# EAGLE board WideField_V2 (EAGLE 7.3.0)
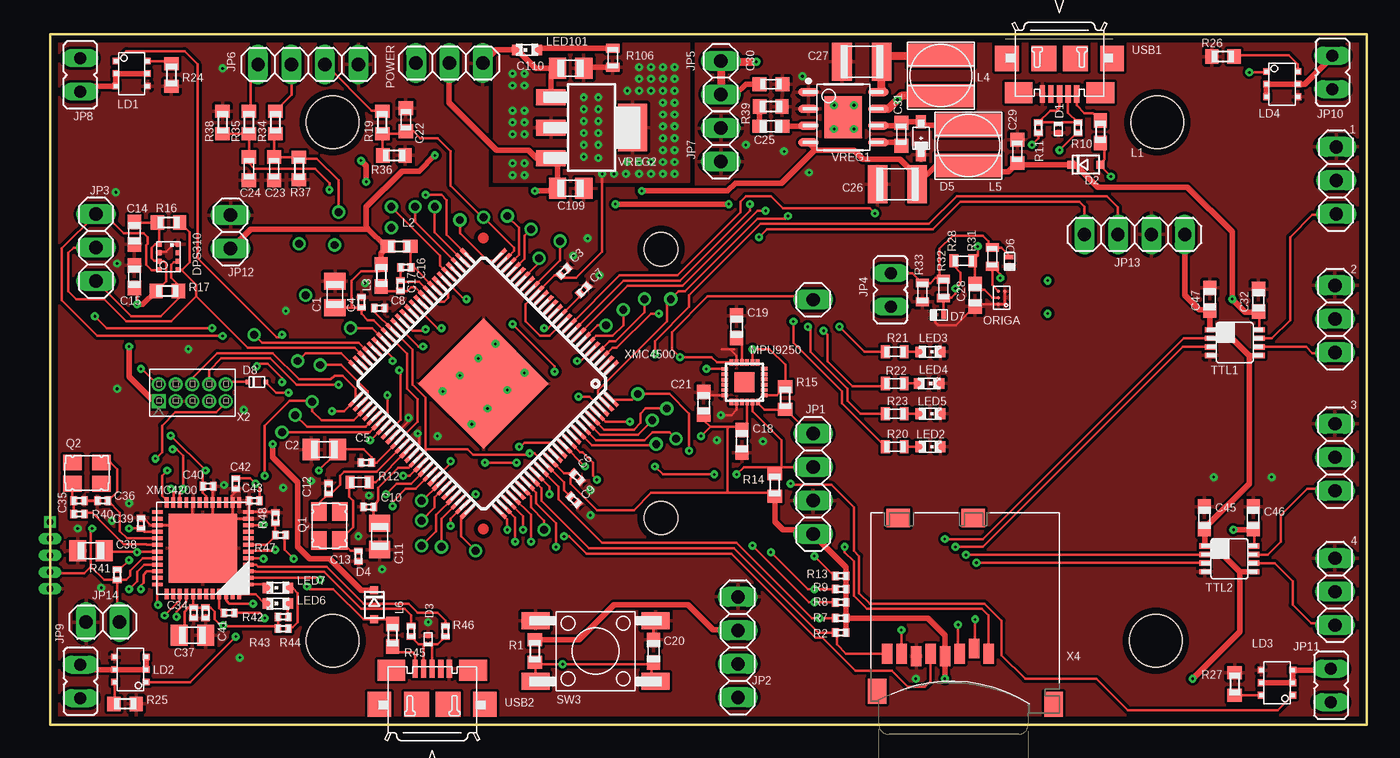
[diagram p0: board, top side]
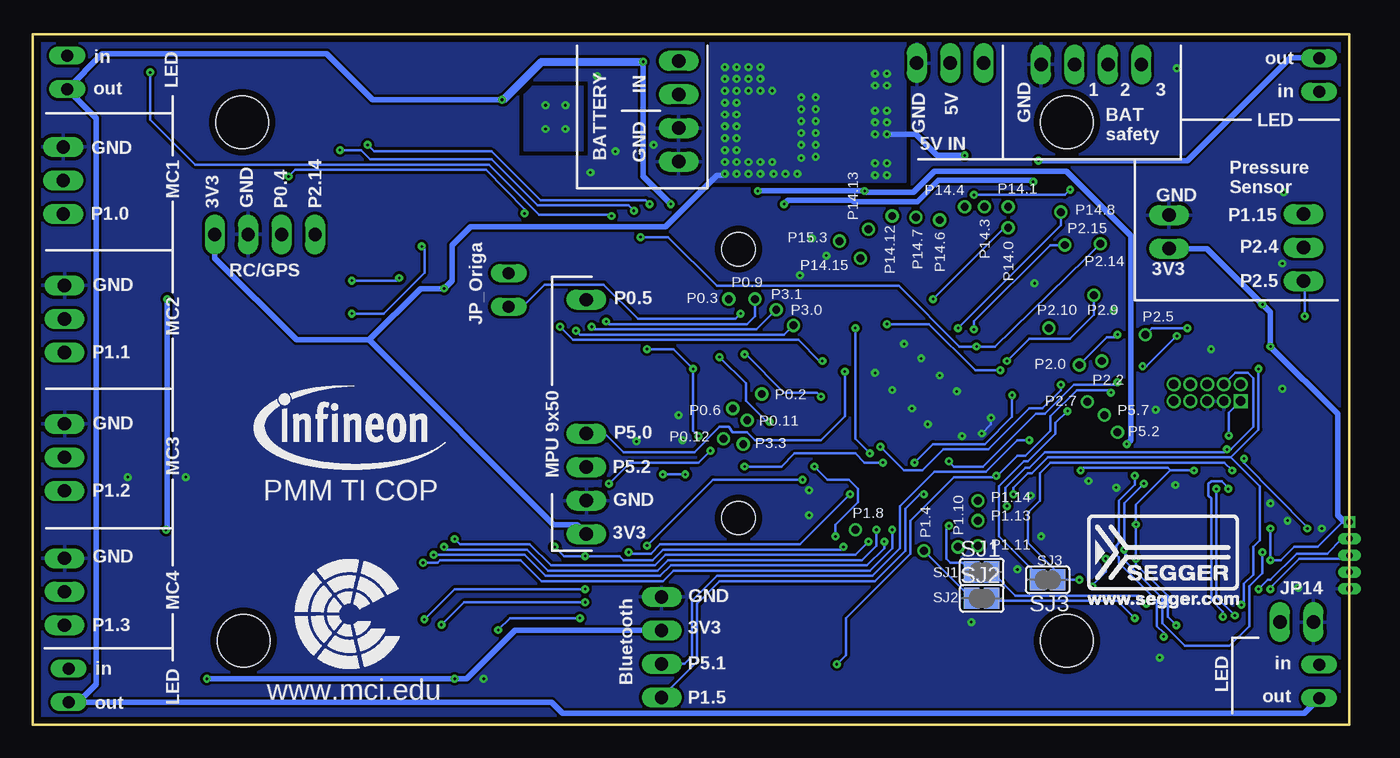
[diagram p1: board, bottom side, seen from below]

Size 99.9 x 52.4 mm. Coordinates in mm from the lower left corner, seen from the top.
Outline: 0,52.4 99.9,52.4 99.9,0 0,0 0,52.4
Copper layers (1*16): Top 0.035mm / dielectric 1.5mm / Bottom 0.035mm
Design rules "Hitzex_CPU_45A *": minimum track width 0.2mm, minimum drill 0.2mm, track to track 0.2mm, track to pad 0.2mm, pad to pad 0.2mm, via to via 0.2mm, smd to smd 0.2mm, copper to edge 0.5mm, drill to drill 0.5mm, minimum pad ring 7mil, minimum via ring 0.2mm, stop-mask expansion 4mil, vias tented up to drill 0.2mm, thermal gap 10mil
Holes 4 mm at 83.92,6.39 21.46,6.39 21.46,45.71 84.02,45.71
Holes 2.54 mm at 46.36,15.69 46.36,36.09

## Footprints (pad centres in the part's own frame; a part is rotated, then mirrored left to right if it is on the bottom)
1X03 = drill 1.016 long: 1 -2.54,0; 2 0,0; 3 2.54,0
C0805K = smd 1.3 x 1.6: 1 -1,0; 2 1,0
C0402 = smd 0.5 x 0.65: 1 -0.4,0; 2 0.4,0
C0603 = smd 1.1 x 1: 1 -0.85,0; 2 0.85,0
C0603K = smd 1.05 x 1.08: 1 -0.875,0; 2 0.875,0
C1210K = smd 1.5 x 2.9: 1 -1.5,0; 2 1.5,0
TSLP-3-1 = smd 0.225 x 0.35: 1 0.113,-0.475; 2 0.487,-0.475 | smd 0.6 x 0.35: 3 0.3,0.175
SOD323-R = smd 0.6 x 0.6: A 1.1,0; C -1.1,0
INF-SOD323_V_1PRIMARY = smd 0.762 x 1.016: 1 0,1.25; 2 0,-1.25
TSLP-2-20 = smd 0.6 x 0.35: P$1 0.1,0.4; P$2 0.1,-0.3
SC79 = smd 0.35 x 0.35: 1 -0.675,0; 2 0.675,0
LGA8R125P0X4_500X300X120 = smd 0.381 x 0.381: P1 0.725,0.975; P2 0.725,0.325; P3 0.725,-0.325; P4 0.725,-0.975; P5 -0.725,-0.975; P6 -0.725,-0.325; P7 -0.725,0.325; P8 -0.725,0.975
1X10 = drill 1.016 long: 1 -11.43,0; 2 -8.89,0; 3 -6.35,0; 4 -3.81,0; 8 6.35,0
1X04 = drill 1.016 long: 1 -3.81,0; 2 -1.27,0; 3 1.27,0; 4 3.81,0
JP1 = drill 0.914 long: 1 0,-1.27; 2 0,1.27
1X02 = drill 1.016 long: 1 -1.27,0; 2 1.27,0
L1608 = smd 1.1 x 1: 1 -0.85,0; 2 0.85,0
WE-TPC = smd 5.08 x 1.778: P$1 0,1.27; P$2 0,-1.778
SC74 = smd 0.5 x 0.5: P_1 -0.05,-2.2; P_2 0.9,-2.2; P_3 1.85,-2.2; P_4 1.85,0.2; P_5 0.9,0.2; P_6 -0.05,0.2
CHIPLED_0603 = smd 0.8 x 0.8: A 0,-0.75; C 0,0.75
QFN3X3-24+ = smd 0.5 x 0.3: 1 -1.5,0.996; 2 -1.5,0.596; 3 -1.5,0.196; 4 -1.5,-0.204; 5 -1.5,-0.604; 6 -1.5,-1.004; 13 1.5,-0.996; 14 1.5,-0.596; 15 1.5,-0.196; 16 1.5,0.204; 17 1.5,0.596; 18 1.5,1.004 | smd 0.3 x 0.5: 7 -0.996,-1.5; 8 -0.596,-1.5; 9 -0.196,-1.5; 10 0.204,-1.5; 11 0.604,-1.5; 12 1.004,-1.5; 19 0.996,1.5; 20 0.596,1.5; 21 0.196,1.5; 22 -0.204,1.5; 23 -0.604,1.5; 24 -1.004,1.5 | smd 1.5 x 1.5: EXP 0,0
WLB-5 = smd 0.25 x 0.25: A1 -0.19,-0.27; A2 -0.19,0.23; B2 0.31,0.23; C1 0.81,-0.27; C2 0.81,0.23
32X25_4PAD = smd 1.4 x 1.2: 1 -1.1,-0.8; 2 1.1,-0.8; 3 1.1,0.8; 4 -1.1,0.8
R0603 = smd 1 x 1.1: 1 -0.85,0; 2 0.85,0
R0402 = smd 0.5 x 0.65: 1 -0.4,0; 2 0.4,0
R0603' = smd 0.67 x 1: 1 -0.715,0; 2 0.715,0
SJ = smd 1.168 x 1.6: 1 -0.762,0; 2 0.762,0
FSM2JSMA = smd 2.1 x 1.3: P -4.55,-2.3; P1 4.55,-2.3; S -4.55,2.3; S1 4.55,2.3
DCT_R-PDSO-G8 = smd 0.4 x 0.8: 1 -0.975,-1.875; 2 -0.325,-1.875; 3 0.325,-1.875; 4 0.975,-1.875; 5 0.975,1.875; 6 0.325,1.875; 7 -0.325,1.875; 8 -0.975,1.875
PINHEADER_SMALL1 = drill 0.6 pad 1: P$1 0,1
PINHEAD_127 = drill 0.508 square: P$1 0,0 | drill 0.508 long: P$2 0,-1.27; P$3 0,-2.54; P$4 0,-3.81; P$5 0,-5.08
ZX62-AB-5PA_MICRO-USB = smd 0.4 x 1.35: 1 -1.3,1.45; 2 -0.65,1.45; 3 0,1.45; 4 0.65,1.45; 5 1.3,1.45 | smd 2.1 x 1.6: S1 -3.1,1.35; S2 3.1,1.35 | smd 1.8 x 1.9: S3 -4,-1.25; S4 4,-1.25 | smd 1.9 x 1.9: S5 -1.2,-1.25; S6 1.2,-1.25
INF-PG-DSO-8-27_N_1PRIMARY = smd 1.55 x 0.6: 1 -2.65,1.905; 2 -2.65,0.635; 3 -2.65,-0.635; 4 -2.65,-1.905; 5 2.65,-1.905; 6 2.65,-0.635; 7 2.65,0.635; 8 2.65,1.905 | smd 2.85 x 3.2: 9 0,0
SOT223 = smd 1.219 x 2.235: 1 -2.311,-3.099; 2 0,-3.099; 3 2.311,-3.099 | smd 3.6 x 2.2: 4 0,3.099
FTSH-105-01-F-D-K = drill 0.7 pad 1.05 square: 1 -2.54,-0.635 | drill 0.7 pad 1.05: 2 -2.54,0.635; 3 -1.27,-0.635; 4 -1.27,0.635; 5 0,-0.635; 6 0,0.635; 7 1.27,-0.635; 8 1.27,0.635; 9 2.54,-0.635; 10 2.54,0.635
3M_MICRO-SD_SLOT = smd 0.8 x 1.5: 1 -1.94,2.7; 2 -0.84,2.3; 3 0.26,2.7; 4 1.36,2.9; 5 2.46,2.7; 6 3.56,2.9; 7 4.66,2.7; 8 5.76,2.7 | smd 1.4 x 1.9: S1 -6.85,6.55; S2 6.55,5.55 | smd 1.8 x 1.4: S3 4.95,-7.6; S4 -0.75,-7.6
QFN-48-7X7 = smd 0.8 x 0.3: 1 -3.45,2.75; 2 -3.45,2.25; 3 -3.45,1.75; 4 -3.45,1.25; 5 -3.45,0.75; 6 -3.45,0.25; 7 -3.45,-0.25; 8 -3.45,-0.75; 9 -3.45,-1.25; 10 -3.45,-1.75; 11 -3.45,-2.25; 12 -3.45,-2.75; 25 3.45,-2.75; 26 3.45,-2.25; 27 3.45,-1.75; 28 3.45,-1.25; 29 3.45,-0.75; 30 3.45,-0.25; 31 3.45,0.25; 32 3.45,0.75; 33 3.45,1.25; 34 3.45,1.75; 35 3.45,2.25; 36 3.45,2.75 | smd 0.3 x 0.8: 13 -2.75,-3.475; 14 -2.25,-3.475; 15 -1.75,-3.475; 16 -1.25,-3.475; 17 -0.75,-3.475; 18 -0.25,-3.475; 19 0.25,-3.475; 20 0.75,-3.475; 21 1.25,-3.475; 22 1.75,-3.475; 23 2.25,-3.475; 24 2.75,-3.475; 37 2.75,3.475; 38 2.25,3.475; 39 1.75,3.475; 40 1.25,3.475; 41 0.75,3.475; 42 0.25,3.475; 43 -0.25,3.475; 44 -0.75,3.475; 45 -1.25,3.475; 46 -1.75,3.475; 47 -2.25,3.475; 48 -2.75,3.475 | smd 5.2 x 5.2: EPAD 0,0
P/PG-LQFP-100-11 = smd 1.35 x 0.29: 1 -7.725,6; 2 -7.725,5.5; 3 -7.725,5; 4 -7.725,4.5; 5 -7.725,4; 6 -7.725,3.5; 7 -7.725,3; 8 -7.725,2.5; 9 -7.725,2; 10 -7.725,1.5; 11 -7.725,1; 12 -7.725,0.5; 13 -7.725,0; 14 -7.725,-0.5; 15 -7.725,-1; 16 -7.725,-1.5; 17 -7.725,-2; 18 -7.725,-2.5; 19 -7.725,-3; 20 -7.725,-3.5; 21 -7.725,-4; 22 -7.725,-4.5; 23 -7.725,-5; 24 -7.725,-5.5; 25 -7.725,-6; 51 7.725,-6; 52 7.725,-5.5; 53 7.725,-5; 54 7.725,-4.5; 55 7.725,-4; 56 7.725,-3.5; 57 7.725,-3; 58 7.725,-2.5; 59 7.725,-2; 60 7.725,-1.5; 61 7.725,-1; 62 7.725,-0.5; 63 7.725,0; 64 7.725,0.5; 65 7.725,1; 66 7.725,1.5; 67 7.725,2; 68 7.725,2.5; 69 7.725,3; 70 7.725,3.5; 71 7.725,4; 72 7.725,4.5; 73 7.725,5; 74 7.725,5.5; 75 7.725,6 | smd 0.29 x 1.35: 26 -6,-7.725; 27 -5.5,-7.725; 28 -5,-7.725; 29 -4.5,-7.725; 30 -4,-7.725; 31 -3.5,-7.725; 32 -3,-7.725; 33 -2.5,-7.725; 34 -2,-7.725; 35 -1.5,-7.725; 36 -1,-7.725; 37 -0.5,-7.725; 38 0,-7.725; 39 0.5,-7.725; 40 1,-7.725; 41 1.5,-7.725; 42 2,-7.725; 43 2.5,-7.725; 44 3,-7.725; 45 3.5,-7.725; 46 4,-7.725; 47 4.5,-7.725; 48 5,-7.725; 49 5.5,-7.725; 50 6,-7.725; 76 6,7.725; 77 5.5,7.725; 78 5,7.725; 79 4.5,7.725; 80 4,7.725; 81 3.5,7.725; 82 3,7.725; 83 2.5,7.725; 84 2,7.725; 85 1.5,7.725; 86 1,7.725; 87 0.5,7.725; 88 0,7.725; 89 -0.5,7.725; 90 -1,7.725; 91 -1.5,7.725; 92 -2,7.725; 93 -2.5,7.725; 94 -3,7.725; 95 -3.5,7.725; 96 -4,7.725; 97 -4.5,7.725; 98 -5,7.725; 99 -5.5,7.725; 100 -6,7.725 | smd 7 x 7: EXP 0,0

## Placement (x,y rotation side)
1  PINHEAD  [1X03]  97.6,41.3 90 top
2  PINHEAD  [1X03]  97.5,30.8 90 top
3  PINHEAD  [1X03]  97.5,20.3 90 top
4  PINHEAD  [1X03]  97.5,10.1 90 top
C1  10uF  [C0805K]  21.62,32.64 90 top
C2  10uF  [C0805K]  20.82,20.89 180 top
C3  100nF  [C0402]  39,34.4 45 top
C4  100nF  [C0402]  23.63,32.05 90 top
C5  100nF  [C0402]  24,19.9 180 top
C6  100nF  [C0402]  40,18.8 315 top
C7  100nF  [C0402]  40.5,33 45 top
C8  100nF  [C0402]  25,31.62 0 top
C9  100nF  [C0402]  39.76,17.06 315 top
C10  100nF  [C0402]  24.17,16.53 180 top
C11  10uF  [C0805K]  25,14.3 270 top
C12  15pF  [C0402]  21.13,17.93 90 top
C13  15pF  [C0402]  23.4,12.8 270 top
C14  100n  [C0603]  6.4,37.3 270 top
C15  100n  [C0603]  6.4,34 270 top
C16  100nF  [C0402]  27,34.7 180 top
C17  100nF  [C0402]  26.6,33.3 90 top
C18  100n  [C0603]  52.5,21.5 270 top
C19  100n  [C0603]  52.1,30.2 270 top
C20  10nF  [C0603]  45.8,5.6 90 top
C21  10n  [C0603]  49.6,24.4 270 top
C22  n.m.  [C0603K]  27,45.9 90 top
C23  n.m.  [C0603K]  17,42.2 270 top
C24  n.m.  [C0603K]  15.1,42.2 270 top
C25  22n  [C0603]  54.7,45.4 0 top
C26  100µ  [C1210K]  64.3,41 180 top
C27  100µ  [C1210K]  61.6,50.3 0 top
C28  100nF  [C0603]  70.2,32.6 90 top
C29  220n  [C0603K]  73.4,43.5 90 top
C30  220n  [C0603K]  54.7,48.6 180 top
C31  220n  [C0603K]  64.6,44.8 270 top
C32  100n  [C0603]  91.7,32.2 90 top
C34  100n  [C0402]  10.9,8.5 270 top
C35  15p  [C0402]  2.2,17 0 top
C36  15p  [C0402]  4,17 180 top
C37  10uF  [C0805K]  10.8,6.8 0 top
C38  4.7µF  [C0805K]  3.1,13.2 180 top
C39  100n  [C0402]  6.9,15.3 90 top
C40  100n  [C0402]  12,18.1 0 top
C41  100n  [C0402]  11.8,8.5 270 top
C42  100n  [C0402]  14.1,18.3 270 top
C43  100n  [C0402]  15.5,17 180 top
C45  100n  [C0603]  87.6,15.7 90 top
C46  100n  [C0603]  91.3,15.7 90 top
C47  100n  [C0603]  88,32.3 90 top
C109  10uF  [C0805K]  39.5,40.7 0 top
C110  10uF  [C0805K]  39.5,49.8 180 top
D1  ESD8V0L2B-03L  [TSLP-3-1]  76.8,45.1 180 top
D2  BAT60A  [SOD323-R]  78.6,42.5 0 top
D3  ESD8V0L2B-03L  [TSLP-3-1]  28.4,6.6 0 top
D4  BAT60A  [SOD323-R]  24.6,9.1 270 top
D5  INF-SOD323_V_1  [INF-SOD323_V_1PRIMARY]  66.1,44.5 180 top
D6  ESD218-B1-02EL  [TSLP-2-20]  72.9,35.2 180 top
D7  ESD218-B1-02EL  [TSLP-2-20]  67.5,31 90 top
D8  BAT54-02V  [SC79]  15.7,26 0 top
DPS310  DPS310  [LGA8R125P0X4_500X300X120]  9,35.5 0 top
JP1  [1X10]  57.9,25.9 90 top
JP2  [1X04]  52.2,5.9 90 top
JP3  [1X03]  3.5,36.2 90 top
JP4  [JP1]  63.8,33 180 top
JP5  [1X02]  50.9,49.1 270 top
JP6  [1X04]  19.6,50.1 0 top
JP7  [1X02]  50.9,44 90 top
JP8  [JP1]  2.3,49.3 180 top
JP9  [JP1]  2.3,3.3 0 top
JP10  [JP1]  97.3,49.5 0 top
JP11  [JP1]  97.2,3 0 top
JP12  [1X02]  13.7,37.4 90 top
JP13  [1X04]  82.3,37.2 180 top
JP14  [1X02]  4,7.8 0 top
L1  BLM18PG600  [L1608]  79.7,45 90 top
L2  BLM18PG600  [L1608]  26.5,36.3 180 top
L3  BLM18PG600  [L1608]  25.13,34.09 90 top
L4  47uH  [WE-TPC]  67.6,49.5 0 top
L5  47uH  [WE-TPC]  69.7,44.2 0 top
L6  BLM18PG600  [L1608]  26,6.8 270 top
LD1  BCU320  [SC74]  7.2,50.3 270 top
LD2  BCU320  [SC74]  5.1,3.3 90 top
LD3  BCU320  [SC74]  92.1,2.3 90 top
LD4  BCU320  [SC74]  94.5,49.5 270 top
LED2  LED-GN/D/0603  [CHIPLED_0603]  66.8,21.1 270 top
LED3  LED-GN/D/0603  [CHIPLED_0603]  66.8,28.3 270 top
LED4  LED-GN/D/0603  [CHIPLED_0603]  66.7,25.9 270 top
LED5  LED-GN/D/0603  [CHIPLED_0603]  66.8,23.6 270 top
LED6  LED-GN/D/0603  [CHIPLED_0603]  17.3,9.2 90 top
LED7  LED-RED/D/0603  [CHIPLED_0603]  17.3,10.4 90 top
LED101  LED-GN/D/0603  [CHIPLED_0603]  36.2,51.2 90 top
MPU9250  9250  [QFN3X3-24+]  52.7,26 180 top
ORIGA  n.m.  [WLB-5]  72.2,32.1 90 top
POWER  [1X03]  30.3,50.2 180 top
Q1  12MHZ/S/3.2X2.5  [32X25_4PAD]  21.2,15.1 270 top
Q2  12MHZ/S/3.2X2.5  [32X25_4PAD]  2.8,19.1 0 top
R1  10k  [R0603]  36.8,5.6 90 top
R2  10k  [R0402]  60,7 0 top
R7  10k  [R0402]  60,8.1 0 top
R8  10k  [R0402]  60,9.3 0 top
R9  10k  [R0402]  60,10.3 0 top
R10  33R  [R0402]  78,45.3 270 top
R11  33R  [R0402]  75,45.3 270 top
R12  510R  [R0603']  23.5,18.4 180 top
R13  10k  [R0402]  60,11.3 0 top
R14  10k  [R0603]  55,18.2 270 top
R15  10k  [R0603]  55.8,24.8 90 top
R16  1k  [R0603]  9,38.1 0 top
R17  1k  [R0603]  8.9,32.9 0 top
R19  30k  [R0603]  25.2,45.7 90 top
R20  680R  [R0603']  64.1,21.1 180 top
R21  680R  [R0603']  64.1,28.3 180 top
R22  680R  [R0603']  64.1,25.9 180 top
R23  680R  [R0603']  64.1,23.6 180 top
R24  n.m.  [R0603]  9.2,49.3 270 top
R25  n.m.  [R0603]  5.7,1.6 0 top
R26  n.m.  [R0603]  89,50.7 180 top
R27  n.m.  [R0603]  89.9,3.1 90 top
R28  20R  [R0603']  69.3,35.2 0 top
R31  25R  [R0603']  71.5,35.5 90 top
R32  1k  [R0603']  67.8,33.1 90 top
R33  330k  [R0603']  66.2,32.8 270 top
R34  30k  [R0603]  17.1,45.7 90 top
R35  30k  [R0603]  15.1,45.7 90 top
R36  10k  [R0603]  26.1,43.2 180 top
R37  10k  [R0603]  18.9,42.2 90 top
R38  10k  [R0603]  13.1,45.7 270 top
R39  22k  [R0603]  54.7,46.9 180 top
R40  510R  [R0402]  2.2,16 0 top
R41  10k  [R0402]  5.1,11.4 90 top
R42  510R  [R0402]  13.6,8.5 0 top
R43  680R  [R0402]  17.7,8.2 180 top
R44  680R  [R0402]  17.7,7.3 180 top
R45  33R  [R0402]  27.4,7.1 90 top
R46  33R  [R0402]  30,7.1 90 top
R47  4.7k  [R0402]  17.5,14.4 180 top
R48  10k  [R0402]  17.1,15.7 90 top
R106  680R  [R0603']  42.7,50.6 270 top
SJ1  [SJ]  27.9,11.6 0 bottom
SJ2  [SJ]  27.9,9.6 0 bottom
SJ3  [SJ]  22.9,11 180 bottom
SW3  TMPS2-SMD  [FSM2JSMA]  41.4,5.6 0 top
TTL1  SN74LVC2T45DCT  [DCT_R-PDSO-G8]  89.9,29 270 top
TTL2  SN74LVC2T45DCT  [DCT_R-PDSO-G8]  89.5,12.6 270 top
U$4  SEGGER.L_100  [LOGO_100]  19.9,9.1 0 top
U$6  PINHEADSMALL1  [PINHEADER_SMALL1]  46,20.3 0 top
U$7  PINHEADSMALL1  [PINHEADER_SMALL1]  47.5,20.7 0 top
U$10  PINHEADSMALL1  [PINHEADER_SMALL1]  43.5,30.5 0 top
U$12  n.m.  [PINHEAD_127]  0,15.4 0 top
U$25  PINHEADSMALL1  [PINHEADER_SMALL1]  42.2,29.3 0 top
U$26  PINHEADSMALL1  [PINHEADER_SMALL1]  21.6,35.4 0 top
U$27  PINHEADSMALL1  [PINHEADER_SMALL1]  18.9,35.5 0 top
U$28  PINHEADSMALL1  [PINHEADER_SMALL1]  22.8,29.1 0 top
U$29  PINHEADSMALL1  [PINHEADER_SMALL1]  19.9,23.5 0 top
U$30  PINHEADSMALL1  [PINHEADER_SMALL1]  19.4,31.6 0 top
U$31  PINHEADSMALL1  [PINHEADER_SMALL1]  15.5,28.6 0 top
U$35  PINHEADSMALL1  [PINHEADER_SMALL1]  20.5,26.3 0 top
U$36  PINHEADSMALL1  [PINHEADER_SMALL1]  18.6,22.5 0 top
U$37  PINHEADSMALL1  [PINHEADER_SMALL1]  17.6,21.2 0 top
U$38  PINHEADSMALL1  [PINHEADER_SMALL1]  38.7,35.7 0 top
U$40  PINHEADSMALL1  [PINHEADER_SMALL1]  32.3,12.2 0 top
U$41  PINHEADSMALL1  [PINHEADER_SMALL1]  25.9,36.7 0 top
U$42  PINHEADSMALL1  [PINHEADER_SMALL1]  25.9,38.3 0 top
U$44  PINHEADSMALL1  [PINHEADER_SMALL1]  27.7,38.3 0 top
U$45  PINHEADSMALL1  [PINHEADER_SMALL1]  29.2,38.3 0 top
U$47  PINHEADSMALL1  [PINHEADER_SMALL1]  31.1,37.3 0 top
U$48  PINHEADSMALL1  [PINHEADER_SMALL1]  32.9,37.5 0 top
U$49  PINHEADSMALL1  [PINHEADER_SMALL1]  21.9,37.9 0 top
U$52  PINHEADSMALL1  [PINHEADER_SMALL1]  34.7,37.6 0 top
U$53  PINHEADSMALL1  [PINHEADER_SMALL1]  36.5,36.6 0 top
U$55  PINHEADSMALL1  [PINHEADER_SMALL1]  37.1,34.4 0 top
U$57  PINHEADSMALL1  [PINHEADER_SMALL1]  37.5,13.8 0 top
U$59  PINHEADSMALL1  [PINHEADER_SMALL1]  29.7,12.5 0 top
U$60  PINHEADSMALL1  [PINHEADER_SMALL1]  28.2,12.6 0 top
U$62  PINHEADSMALL1  [PINHEADER_SMALL1]  28.2,14.5 0 top
U$63  PINHEADSMALL1  [PINHEADER_SMALL1]  28.2,16 0 top
U$65  PINHEADSMALL1  [PINHEADER_SMALL1]  18.8,26.6 0 top
U$67  PINHEADSMALL1  [PINHEADER_SMALL1]  44.6,24.1 0 top
U$68  PINHEADSMALL1  [PINHEADER_SMALL1]  47.1,31.3 0 top
U$71  PINHEADSMALL1  [PINHEADER_SMALL1]  46.8,23 0 top
U$74  PINHEADSMALL1  [PINHEADER_SMALL1]  45.1,31.3 0 top
U$76  PINHEADSMALL1  [PINHEADER_SMALL1]  45.7,22.1 0 top
USB1  ZX62-AB-5PA  [ZX62-AB-5PA_MICRO-USB]  76.6,49.3 180 top
USB2  ZX62-AB-5PA  [ZX62-AB-5PA_MICRO-USB]  29,2.8 0 top
VREG1  IFX-91041-V50  [INF-PG-DSO-8-27_N_1PRIMARY]  60.2,46.1 0 top
VREG2  IFX1117MEV33  [SOT223]  41.1,45.3 270 top
X2  FTSH-105-01-F-D-K  [FTSH-105-01-F-D-K]  10.8,25.2 0 top
X4  3M_2908-05WB  [3M_MICRO-SD_SLOT]  69.3,8.1 180 top
XMC4200  XMC4200_QFN48  [QFN-48-7X7]  11.6,13.4 180 top
XMC4500  XMC4500_LQFP100  [P/PG-LQFP-100-11]  32.89,25.89 225 top

## Library data of the parts
1-4 JP1-JP3 JP5-JP7 JP12-JP14 POWER = pinhead
C1 C2 C11 C38 C109 C110 = libHMI_OLED-V1
C3-C10 C12 C13 C16 C17 C34-C36 C39-C43 = libDsC
C14 C15 C18-C32 C37 C45-C47 R1 R14-R17 R19 R24-R27 R34-R39 = libresistor
D1-D4 = libDsDiod
D5 = libBAS21-03W_INF-SOD323V
D6 D7 = libESD218-B1
D8 = DsDiod
DPS310 = libdrucksensorDPS310
JP4 JP8-JP11 SJ1-SJ3 = jumper
L1-L3 L6 = libPDFerr
L4 L5 = lib47µHWuerthChoke
LD1-LD4 = libLEDtreiber BCR320U
LED2-LED7 LED101 = libled
MPU9250 = libinvensense9250
ORIGA = libORIGA
Q1 Q2 = Quarz
R2 R7-R13 R20-R23 R28 R31-R33 R40-R48 R106 = libDsR
SW3 = MSwitch
TTL1 TTL2 = libLEVELSHIFTER_SN74LVCxT45
U$4 = libBOOTKIT1100SEGGER_logo
U$6 U$7 U$10 U$25-U$31 U$35-U$38 U$40-U$42 U$44 U$45 U$47-U$49 U$52 U$53 U$55 U$57 U$59 U$60 U$62 U$63 U$65 U$67 U$68 U$71 U$74 U$76 = pinhead_small1
U$12 = libpinhead_127_marked
USB1 USB2 = XSRRND
VREG1 = libInfineon-DCDC-91041 - DSO-8
VREG2 XMC4500 = libXMC4500_Relax-V1+USBvertical
X2 = Xtv127
X4 = HMI_OLED-V1
XMC4200 = libXMC4000_v4.16

## Nets
AGND: C16.2 C17.2 XMC4500.32 XMC4500.34
AUX_LED: LED7.C XMC4200.1
COOLING: VREG1.9
CS: XMC4200.23 XMC4200.40
DBGPRES#: JP14.2 R41.1 U$12.P$4 X2.9 XMC4200.32
DEBUG_LED: LED6.C XMC4200.48
DEBUG_RX_XMC42/TX_XMC45: SJ1.2 XMC4200.46
DEBUG_TX_XMC42/RX_XMC45: R42.2 SJ2.2
ETH_CLK: XMC4500.39
ETH_CRS: XMC4500.38
ETH_RXD1: XMC4500.49
ETH_TXD0: XMC4500.46
ETH_TXD1: U$30.P$1 XMC4500.45
GND: 1.3 2.3 3.3 4.3 C1.2 C2.2 C3.2 C4.2 C5.2 C6.2 C7.2 C8.2 C9.2 C10.2 C11.2 C12.2 C13.2 C14.2 C15.1 C18.2 C19.1 C20.2 C21.1 C22.2 C23.2 C24.2 C26.2 C27.1 C28.1 C29.2 C30.1 C32.2 C34.2 C35.2 C36.2 C37.2 C38.2 C39.2 C40.2 C41.2 C42.2 C43.2 C45.2 C46.2 C47.2 C109.2 C110.2 D1.3 D3.3 D5.1 D6.P$1 D7.P$1 DPS310.P1 DPS310.P7 JP1.2 JP2.4 JP6.4 JP7.1 JP7.2 JP12.2 JP13.2 JP14.1 LD1.P_4 LD2.P_4 LD3.P_4 LD4.P_4 LED2.C LED3.C LED4.C LED5.C LED101.C MPU9250.11 MPU9250.18 MPU9250.20 ORIGA.A1 ORIGA.A2 ORIGA.C1 POWER.1 R24.2 R25.2 R26.2 R27.2 R33.2 R36.1 R37.1 R38.1 R39.1 R48.2 SW3.S SW3.S1 TTL1.4 TTL2.4 U$12.P$5 USB1.5 USB2.5 VREG1.1 VREG1.2 VREG2.1 X2.3 X2.5 X4.6 XMC4200.11 XMC4200.12 XMC4200.13 XMC4200.14 XMC4200.17 XMC4200.20 XMC4200.27 XMC4200.EPAD XMC4500.59 XMC4500.63 XMC4500.EXP
HIB_IO_0: XMC4500.14
HIB_IO_1: XMC4500.13
MMC_CLK: X4.5 XMC4500.90
MMC_CMD: R8.1 X4.3 XMC4500.91
MMC_DAT0: R7.1 X4.7 XMC4500.85
MMC_DAT1: R2.1 X4.8 XMC4500.83
MMC_DAT2: R13.1 X4.1 XMC4500.82
MMC_DAT3: R9.1 X4.2 XMC4500.84
N$1: LED2.A R20.1
N$2: C38.1 C42.1 C43.1 XMC4200.6 XMC4200.31
N$3: LED3.A R21.1
N$4: LED6.A R43.1
N$5: LED7.A R44.1
N$6: R12.1 XMC4500.62
N$7: C13.1 Q1.3 R12.2
N$8: C12.1 Q1.1 XMC4500.61
N$9: JP6.1 R35.2
N$10: C35.1 Q2.1 R40.1
N$11: L1.2 USB1.1
N$12: C25.2 VREG1.3
N$13: D1.1 R10.1 USB1.2
N$15: C25.1 R39.2
N$16: LED101.A R106.1
N$17: C27.2 L4.P$1 VREG1.8
N$19: C28.2 ORIGA.B2 R28.2
N$21: JP6.2 R34.2
N$22: LED4.A R22.1
N$23: D2.A L1.1 XMC4500.10
N$24: LED5.A R23.1
N$25: ORIGA.C2 R31.1
N$26: LD1.P_6 R24.1
N$27: D6.P$2 JP4.1 R31.2 R32.2 R33.1
N$28: JP8.2 LD1.P_2 LD1.P_3 LD1.P_5
N$29: LD2.P_6 R25.1
N$30: JP9.2 LD2.P_2 LD2.P_3 LD2.P_5
N$31: LD4.P_6 R26.1
N$32: JP10.2 LD4.P_2 LD4.P_3 LD4.P_5
N$33: LD3.P_6 R27.1
N$34: JP11.2 LD3.P_2 LD3.P_3 LD3.P_5
N$35: JP6.3 R19.2
N$36: D1.2 R11.1 USB1.3
N$37: C31.2 VREG1.5
N$38: L6.2 USB2.1
N$39: C31.1 D5.2 L5.P$1 VREG1.6
N$40: R40.2 XMC4200.30
N$41: C36.1 Q2.3 XMC4200.29
N$42: C19.2 MPU9250.10
N$44: D8.1 X2.10
N$47: D3.1 R45.1 USB2.2
N$48: D3.2 R46.1 USB2.3
N$49: D4.A L6.1 R47.1
N$50: R42.1 XMC4200.45
N$52: R47.2 R48.1 XMC4200.7
P0.0: XMC4500.2
P0.1: XMC4500.1
P0.2: LD3.P_1 U$67.P$1 XMC4500.100
P0.3: LD4.P_1 U$68.P$1 XMC4500.99
P0.4: JP13.3 XMC4500.98
P0.5: JP1.8 MPU9250.12 XMC4500.97
P0.6: U$71.P$1 XMC4500.96
P0.7: X2.8 XMC4500.89
P0.8: XMC4500.88
P0.9: R20.2 U$74.P$1 XMC4500.4
P0.10: JP4.2 XMC4500.3
P0.11: U$76.P$1 XMC4500.95
P0.12: U$7.P$1 XMC4500.94
P1.0: TTL1.2 XMC4500.79
P1.1: TTL1.3 XMC4500.78
P1.2: TTL2.2 XMC4500.77
P1.3: TTL2.3 XMC4500.76
P1.4: SJ2.1 U$40.P$1 XMC4500.75
P1.5: JP2.1 SJ1.1 XMC4500.74
P1.8: U$57.P$1 XMC4500.81
P1.9: XMC4500.80
P1.10: U$59.P$1 XMC4500.73
P1.11: U$60.P$1 XMC4500.72
P1.12: XMC4500.71
P1.13: U$62.P$1 XMC4500.70
P1.14: U$63.P$1 XMC4500.69
P1.15: DPS310.P5 JP3.3 XMC4500.68
P2.0: LD1.P_1 U$35.P$1 XMC4500.52
P2.2: U$65.P$1 XMC4500.50
P2.4: DPS310.P4 JP3.2 R16.2 XMC4500.48
P2.5: DPS310.P3 JP3.1 R17.2 U$31.P$1 XMC4500.47
P2.6: XMC4500.54
P2.7: LD2.P_1 U$29.P$1 XMC4500.53
P2.10: U$28.P$1 XMC4500.44
P2.14: JP13.4 U$27.P$1 XMC4500.41
P2.15: U$26.P$1 XMC4500.40
P3.0: R22.2 U$25.P$1 XMC4500.7
P3.1: R23.2 U$10.P$1 XMC4500.6
P3.2: R21.2 XMC4500.5
P3.3: U$6.P$1 XMC4500.93
P3.4: XMC4500.92
P5.0: JP1.4 MPU9250.24 R15.1 XMC4500.58
P5.1: JP2.2 XMC4500.57
P5.2: JP1.3 MPU9250.23 R14.1 U$37.P$1 XMC4500.56
P5.7: U$36.P$1 XMC4500.55
P14.0: U$41.P$1 XMC4500.31
P14.1: U$42.P$1 XMC4500.30
P14.2: XMC4500.29
P14.3: U$44.P$1 XMC4500.28
P14.4: U$45.P$1 XMC4500.27
P14.5: C24.1 R35.1 R38.2 XMC4500.26
P14.6: U$47.P$1 XMC4500.25
P14.7: C22.1 R19.1 R36.2 U$48.P$1 XMC4500.24
P14.8: C23.1 R34.1 R37.2 U$49.P$1 XMC4500.37
P14.9: XMC4500.36
P14.12: U$52.P$1 XMC4500.23
P14.13: U$53.P$1 XMC4500.22
P14.14: XMC4500.21
P14.15: U$55.P$1 XMC4500.20
P15.2: XMC4500.19
P15.3: U$38.P$1 XMC4500.18
PWM_MC1: 1.1 TTL1.7
PWM_MC2: 2.1 TTL1.6
PWM_MC3: 3.1 TTL2.7
PWM_MC4: 4.1 TTL2.6
RESET#: C20.1 D8.2 R1.1 SW3.P SW3.P1 XMC4500.65
RTC1: XMC4500.15
RTC2: XMC4500.16
SWV: SJ3.2 X2.6 XMC4500.51
SWV_DBG: SJ3.1 XMC4200.2 XMC4200.24
TCK: X2.4 XMC4200.22 XMC4200.39 XMC4500.67
TMS: X2.2 XMC4200.35 XMC4200.36 XMC4500.66
USB_DM: R10.2 XMC4500.8
USB_DM1: R45.2 XMC4200.3
USB_DP: R11.2 XMC4500.9
USB_DP1: R46.2 XMC4200.4
VAREF: C16.1 L2.1 XMC4500.33
VBAT: C30.2 JP5.1 JP5.2 JP8.1 JP9.1 JP10.1 JP11.1 L4.P$2 VREG1.7
VDD3.3: C1.1 C2.1 C3.1 C4.1 C5.1 C6.1 C14.1 C15.2 C18.1 C21.2 C34.1 C37.1 C39.1 C40.1 C41.1 C45.1 C47.1 C110.1 D7.P$2 DPS310.P6 DPS310.P8 JP1.1 JP2.3 JP12.1 JP13.1 L2.2 L3.2 MPU9250.1 MPU9250.8 MPU9250.13 MPU9250.22 R1.2 R2.2 R7.2 R8.2 R9.2 R13.2 R14.2 R15.2 R16.1 R17.1 R28.1 R32.1 R41.2 R43.2 R44.2 R106.2 TTL1.1 TTL1.5 TTL2.1 TTL2.5 U$12.P$1 VREG2.2 VREG2.4 X2.1 X4.4 XMC4200.5 XMC4200.10 XMC4200.18 XMC4200.28 XMC4200.41 XMC4500.11 XMC4500.17 XMC4500.43 XMC4500.60 XMC4500.87
VDD5: C26.1 C29.1 C32.1 C46.1 C109.1 D2.C D4.C L5.P$2 POWER.2 TTL1.8 TTL2.8 VREG1.4 VREG2.3
VDDA: C17.1 L3.1 XMC4500.35
VDDC: C7.1 C8.1 C9.1 C10.1 C11.1 XMC4500.12 XMC4500.42 XMC4500.64 XMC4500.86
WTCK: U$12.P$2 XMC4200.34
WTMS: U$12.P$3 XMC4200.33

## Tracks (layer width: path | path; a pad name or v marks a point on that pad's centre or on a via)
AGND
  Top 0.2: XMC4500.32 29.55,33.45 30.2,32.8 30.2,32.4 29.9,32.1 29.51,32.1 XMC4500.34 28.01,33.6 26.7,33.6 C17.2 C16.2
AUX_LED
  Top 0.2: LED7.C 16.3,10.65 XMC4200.1
COOLING  (via drill 0.2)
  Top 0.61: v59.5,45.2 59.5,45.4 VREG1.9
  other vias: 59.5,47 61,47 61,45.2
  pour Bottom: 58.2,48.4 62,48.4 62.6,47.8 62.6,43.6 58.2,43.6
CS  (via drill 0.2)
  Top 0.2: XMC4200.40 10.35,9.35 9.6,8.6 v9.6,8.2 | XMC4200.23 9.4,16.92 9.4,17.7 v9.2,17.9
  Bottom 0.2: v9.6,8.2 9.6,8.6 10.5,9.5 10.5,17.2 10.7,17.4 10.7,18.3 10.5,18.5 9.7,18.5 9.2,18 v9.2,17.9
DBGPRES#  (via drill 0.2)
  Top 0.2: XMC4200.32 7.05,12.65 6.1,11.7 6.1,11.3 5.8,11 R41.1 | X2.9 13.34,24.44 12.6,23.7 9.5,23.7 8.5,22.7 8.5,20.7 v8,20.2 | v3.2,14.9 3.1,14.8 3.1,12 | 5,11.1 R41.1 | 3.1,12 4.1,11 R41.1 | 3.1,12 2.6,11.5 0.09,11.5 U$12.P$4 | R41.1 5.1,7.97 JP14.2
  Bottom 0.2: v8,20.2 8,19.9 3.2,15 v3.2,14.9
DEBUG_LED
  Top 0.2: XMC4200.48 14.38,9.9 15.6,9.9 16.3,9.2 LED6.C
DEBUG_RX_XMC42/TX_XMC45  (via drill 0.2)
  Top 0.2: v15.4,9.2 13.6,9.2 13.35,9.45 XMC4200.46
  Bottom 0.2: v15.4,9.2 16,9.8 25.34,9.8 SJ1.2
DEBUG_TX_XMC42/RX_XMC45  (via drill 0.2)
  Top 0.2: v16.3,8.1 15.9,8.5 R42.2
  Bottom 0.2: SJ2.2 26.94,9.4 17.6,9.4 v16.3,8.1
ETH_TXD1  (via drill 0.2)
  Top 0.2: XMC4500.45 26,27.84 v26,27.6
  Bottom 0.2: v26,27.6 24.3,29.3 21.2,29.3 19.4,31.1 U$30.P$1
GND  (via drill 0.2, 0.2 pad 0.2)
  Top 0.2: ORIGA.C1 ORIGA.A1 ORIGA.A2 70.36,31.91 C28.1 68.75,30.3 67.4,30.3 67.2,30.5 67.2,31 D7.P$1 | DPS310.P7 8.35,35.9 8.8,35.9 9.38,36.48 DPS310.P1 | R33.2 66.2,32 | XMC4500.63 28,21 28,22 v27.9,22.1 | XMC4500.59 27.2,23.03 v27.2,23.3 | C21.1 49.85,25 MPU9250.18 | MPU9250.20 52.1,23.9 51.7,23.5 v50.9,23.5 | 51.9,28.5 51.6,28.5 | 51.6,28.5 51,28.5 | C20.2 45.8,7.75 SW3.S1 | C39.2 7.1,15.7 7.65,15.15 XMC4200.27 10.75,15.15 10.8,15.2 | C35.2 C36.2 | R48.2 17.05,16.15 XMC4200.12 | 14.35,16.85 XMC4200.13 XMC4200.14 | 12.35,14.15 XMC4200.17 12.35,17.85 12.4,17.9 C40.2 | 12.35,14.15 11.95,13.75 | 11.95,13.75 XMC4200.EPAD | XMC4200.14 13.85,15.05 13.8,15 13.2,15 | 13.2,15 12.35,14.15 | 13.2,15 13.85,15.65 XMC4200.11 XMC4200.12 | XMC4200.20 10.8,16.82 10.8,15.2 | 10.8,15.2 11.95,14.05 11.95,13.75 | C43.2 15.1,16.2 XMC4200.12 | C42.2 14.1,17.7 13.8,17.4 13.8,16.92 XMC4200.14 | MPU9250.11 52.1,28 51.6,28.5
  Top 0.406: POWER.1 33.84,51.2 LED101.C 36.85,49.8 C110.2 38,49.3 VREG2.1
  Bottom 0.2: v27.9,22.1 27.2,22.8 v27.2,23.3
  other vias: 32.5,27.8 33.8,28.9 36,26.7 34.7,25.4 32,22.8 31.1,26.5 41,17.8 65.7,3.5 54.1,21.5 50.6,21.6 29.8,25.3 33.2,24 52.8,44 57.6,41.9 13.1,49.8 41,15.9 23.9,33.5 5,40.4 5.1,35 23.4,14.3 39.7,35.6 40.8,36.9 41.7,34.1 29.4,21.9 13.2,18.2 4.7,15.5 6,16.8 2.1,14.9 3.9,10.4 5.1,25.5 10.5,28.5 14.4,5.1 14.7,23.9 17.9,31.4 28.7,7.8 25.2,11.8 17.7,18 92.7,18.8 88.3,18.8 19.8,18.5 55.7,43.5 57.1,49.2 24.2,17.4
  pour Top: 0,52.4 33.2,52.4 33.2,40.7 49,40.7 49,52.4 99.8,52.4 99.8,0 0,0
  pour Bottom: 0,52.4 33.2,52.4 33.2,40.8 33.2,40.7 49,40.7 49,52.4 59.9,52.4 59.9,48.9 57.7,48.9 57.7,43.2 57.7,43.1 63.1,43.1 63.1,48.6 63.1,48.9 60.1,48.9 60.1,52.4 99.9,52.4 99.9,0 0,0
MMC_CLK  (via drill 0.2)
  Top 0.2: X4.5 66.8,5.36 66.8,3.3 66.4,2.9 65.1,2.9 63.9,4.1 61.1,4.1 58.6,6.6 58.1,6.6 51.7,13 40.7,13 39.4,14.3 v39,14.3 | v40.6,19.6 40.5,19.7 XMC4500.90
  Bottom 0.2: v39,14.3 39,15.2 37.3,16.9 37.3,17.9 38,18.6 39.6,18.6 v40.6,19.6
MMC_CMD  (via drill 0.2)
  Top 0.2: R8.1 v58,9.3 57.6,9.3 v53.3,13.6 | v68.9,7.6 68.9,5.54 X4.3 | v41.5,18.6 41.2,18.9 41.2,19.9 40.4,20.7 40.2,20.7 XMC4500.91
  Bottom 0.2: v58,9.3 67.2,9.3 v68.9,7.6 | v53.3,13.6 48.3,18.6 v41.5,18.6
MMC_DAT0  (via drill 0.2)
  Top 0.2: R7.1 v58.4,8.1 57.8,8.1 52.1,13.8 41.9,13.8 38.6,17.1 38.6,18.06 XMC4500.85 37.3,19.3 | v64.6,7.2 64.6,5.44 X4.7
  Bottom 0.2: v58.4,8.1 63.7,8.1 v64.6,7.2
MMC_DAT1
  Top 0.2: X4.8 60.4,5.4 59.7,6.1 59.7,6.9 R2.1 58.3,7 51.9,13.4 40.9,13.4 37.3,17 37.3,17.95 XMC4500.83
MMC_DAT2  (via drill 0.2)
  Top 0.2: v58,12.8 59.5,11.3 R13.1 | X4.1 71.2,5.44 71.2,8.3 70.7,8.8 62,8.8 61,9.8 61,12.4 60.3,13.1 v60.3,13.5 | v38.4,13.5 38.4,15.3 36.9,16.8 36.9,17.6 36.23,18.27 XMC4500.82
  Bottom 0.2: v60.3,13.5 59.6,12.8 v58,12.8 55.4,12.8 55.1,12.5 52.9,12.5 52.1,13.3 38.6,13.3 v38.4,13.5
MMC_DAT3  (via drill 0.2)
  Top 0.2: R9.1 v58,10.3 57.5,10.3 v54.7,13.1 | v70.2,8 70.2,5.86 X4.2 | XMC4500.84 37.9,18.06 v37.9,17.5
  Bottom 0.2: v58,10.3 67.9,10.3 v70.2,8 | v54.7,13.1 54.6,13 53,13 52.3,13.7 41.7,13.7 v37.9,17.5
N$1
  Top 0.2: R20.1 LED2.A
N$2  (via drill 0.2)
  Top 0.2: 6.65,13.15 4.55,13.15 C38.1 | XMC4200.31 6.65,13.15 | 6.65,13.15 v6.6,13.1 | v17.1,13.3 17,13.2 15.1,13.2 XMC4200.6 | C42.1 15.2,18.7 v15.6,18.3 15.9,18 C43.1
  Bottom 0.2: v6.6,13.1 6.6,11.5 7.6,10.5 7.6,7.5 9.1,6 12.5,6 14.2,7.7 14.2,9.6 17,12.4 17,13.2 v17.1,13.3 17.1,16.8 v15.6,18.3
N$3
  Top 0.2: R21.1 LED3.A
N$4
  Top 0.2: LED6.A 18.05,8.25 R43.1
N$5
  Top 0.2: LED7.A 18.4,10.4 18.8,10 18.8,7.8 18.4,7.4 18.2,7.4 R44.1
N$6
  Top 0.2: R12.1 24.69,18.4 XMC4500.62
N$7
  Top 0.2: C13.1 22.8,13.2 Q1.3 22.98,14.99 22.98,17.01 22.7,17.3 22.7,18.29 R12.2
N$8
  Top 0.2: Q1.1 20.4,16.8 C12.1 21.33,17.53 22,18.2 22,18.9 22.3,19.2 24.79,19.2 XMC4500.61
N$9
  Top 0.2: R35.2 15.23,46.72 15.23,49.26 JP6.1
N$10
  Top 0.2: Q2.1 1.7,17.1 C35.1 R40.1
N$11
  Top 0.2: USB1.1 77.9,47 78.5,46.4 79.15,46.4 L1.2
N$12
  Top 0.406: VREG1.3 57.48,45.4 C25.2
N$13
  Top 0.2: D1.1 76.81,45.7 R10.1 77.25,46.45 USB1.2
N$15
  Top 0.406: C25.1 R39.2
N$16
  Top 0.2: LED101.A 37.06,51.31
  Top 0.406: 37.06,51.31 R106.1
N$17
  Top 0.406: VREG1.8 63.1,48.25 | L4.P$1 67.03,50.5
  Top 0.61: 63.1,48.25 C27.2 63.57,50.77 L4.P$1
N$19  (via drill 0.2)
  Top 0.2: ORIGA.B2 71.49,32.41 70.9,33 70.65,33 C28.2 70.2,35.02 R28.2 70.4,35.59 v70.4,36.3
  Bottom 0.2: v75.7,31.2 73.3,31.2 70.2,34.3 70.2,36.1 v70.4,36.3
N$21
  Top 0.2: JP6.2 18.33,47.78 R34.2
N$22
  Top 0.2: R22.1 LED4.A
N$23  (via drill 0.2)
  Top 0.2: v80.5,41.6 79.7,42.4 D2.A 79.7,42.61 80,42.91 80,44.18 L1.1 | v62.6,38.8 62.2,39.2 55.6,39.2 54.7,40.1 52.8,40.1 52.4,39.7 52.4,38.9 47.6,34.1 43.22,34.1 XMC4500.10
  Bottom 0.2: v80.5,41.6 80,42.1 65.5,42.1 62.6,39.1 v62.6,38.8
N$24
  Top 0.2: R23.1 LED5.A
N$25  (via drill 0.2)
  Top 0.2: ORIGA.C2 71.5,33.38 R31.1 72.1,34.18 v72.1,33.9
  Bottom 0.2: v75.7,33.7 72.3,33.7 v72.1,33.9
N$26
  Top 0.2: R24.1 9,50.35 LD1.P_6
N$27
  Top 0.2: JP4.1 65.45,34.27 R33.1 66.82,33.52 67.2,33.9 67.72,33.9 R32.2 67.69,33.81 67.5,34 67.5,36.1 68.5,37.1 70.8,37.1 71.22,36.68 71.22,36.5 R31.2 71.52,36.2 72.2,36.2 72.8,35.6 D6.P$2
N$28
  Top 0.406: LD1.P_5 LD1.P_2 LD1.P_3 2.72,48.45 JP8.2
N$29
  Top 0.2: LD2.P_6 4.9,1.65 R25.1
N$30
  Top 0.406: JP9.2 2.67,4.2 LD2.P_5 LD2.P_2 LD2.P_3
N$31
  Top 0.2: LD4.P_6 94.7,50.1 94,50.8 89.95,50.8 R26.1
N$32
  Top 0.406: JP10.2 97.3,50.7 95.2,48.6 LD4.P_5 LD4.P_2 LD4.P_3
N$33
  Top 0.2: LD3.P_6 R27.1
N$34
  Top 0.406: LD3.P_5 LD3.P_2 LD3.P_3 97.08,4.15 JP11.2
N$35
  Top 0.2: JP6.3 20.9,50.1 24.4,46.6 25.15,46.6 R19.2
N$36
  Top 0.2: D1.2 76.19,45.7 R11.1 75.9,46.6 76.4,46.6 76.6,46.8 USB1.3
N$37
  Top 0.406: C31.2 64.33,44.2 VREG1.5
N$38
  Top 0.2: USB2.1 27.7,5.3 27.5,5.5 26.45,5.5 L6.2
N$39
  Top 0.406: VREG1.6 64.39,45.46 C31.1 64.62,45.6 64.78,45.75 D5.2 66.38,45.47 L5.P$1
N$40
  Top 0.2: XMC4200.30 7.35,13.65 7.3,13.7 5.6,13.7 3.2,16.1 2.7,16.1 R40.2
N$41
  Top 0.2: XMC4200.29 5.85,14.15 5.3,14.7 5.3,16.1 C36.1 5.1,17.7 5.1,19.4 4.6,19.9 Q2.3
N$42
  Top 0.2: C19.2 52.5,28.95 MPU9250.10
N$44
  Top 0.2: X2.10 13.53,26.02 15.01,26.02 D8.1
N$47
  Top 0.2: USB2.2 28.35,5.96 D3.1 27.97,6.12 R45.1
N$48
  Top 0.2: USB2.3 29,6.01 D3.2 29.42,6.12 R46.1
N$49  (via drill 0.2)
  Top 0.2: L6.1 25.65,8 D4.A 23.8,8 21.5,10.3 19.7,10.3 v19.5,10.5 | v18.5,12.6 17.8,13.3 17.8,14.3 R47.1
  Bottom 0.2: v19.5,10.5 19.5,10.6 18.5,11.6 v18.5,12.6
N$50
  Top 0.2: XMC4200.45 12.85,8.85 R42.1
N$52
  Top 0.2: R48.1 R47.2 17.1,14.3 16.45,13.65 XMC4200.7
P0.2  (via drill 0.2)
  Top 0.2: LD3.P_1 93.15,1.1 81.8,1.1 79.4,3.5 74,3.5 72.2,5.3 72.2,7.9 70.9,9.2 62.2,9.2 61.4,10 61.4,12.8 61,13.2 61,16.5 59.3,18.2 56.3,18.2 v56.2,18.3 | XMC4500.100 44.17,24.67 U$67.P$1 47,25.1 48.5,23.6 v48.5,20.8
  Bottom 0.2: v56.2,18.3 54.6,19.9 49.4,19.9 v48.5,20.8
P0.3  (via drill 0.2)
  Top 0.2: LD4.P_1 92.25,49.5 v91,49.5 | v56,38.6 55.8,38.4 53.7,38.4 48.2,32.9 47.7,32.9 U$68.P$1 46.8,32 46.8,30.6 41.6,25.4 41.6,24.96 XMC4500.99
  Bottom 0.2: v91,49.5 91,45.9 87.6,42.5 65.3,42.5 61.5,38.7 56.1,38.7 v56,38.6
P0.4  (via drill 0.2)
  Top 0.2: XMC4500.98 40.96,24.9 v40.1,24.9 | v45.9,28.1 45.9,29.1 48.5,31.7 48.5,32.6 53.9,38 66.7,38 68.8,40.1 80.2,40.1 81.03,39.27 JP13.3
  Bottom 0.2: v40.1,24.9 40.4,25.2 42.9,25.2 45.8,28.1 v45.9,28.1
P0.5  (via drill 0.2)
  Top 0.2: JP1.8 57.65,32.5 49.9,32.5 47.2,29.8 47.2,28.5 v47.8,27.9 50.2,27.9 50.6,27.5 MPU9250.12 | v44,23 42.15,23 XMC4500.97
  Bottom 0.2: v44,23 44.2,23 45.8,24.6 45.8,25.9 v47.8,27.9
P0.6
  Top 0.2: XMC4500.96 42.04,22.4 44.3,22.4 44.8,22.9 44.8,23.6 45.2,24 U$71.P$1
P0.7  (via drill 0.2)
  Top 0.2: XMC4500.89 38.09,21.4 36,21.4 35.7,21.1 v35.6,21.1 | v21.9,25.8 18.7,25.8 16.7,27.8 13,27.8 12.07,26.87 X2.8
  Bottom 0.2: v35.6,21.1 33.8,19.3 32.4,19.3 30.8,20.9 27.4,20.9 24.3,24 23.3,24 21.9,25.4 v21.9,25.8
P0.9  (via drill 0.2)
  Top 0.2: XMC4500.4 42.46,29.1 42.9,29.1 45.1,31.3 U$74.P$1 | v56.4,30.6 56.4,29 60.1,25.3 60.1,24.38 R20.2
  Bottom 0.2: v56.4,30.6 56.2,30.4 45.7,30.4 45.1,31 U$74.P$1
P0.10  (via drill 0.2)
  Top 0.2: XMC4500.3 42.67,28.6 43,28.6 45.6,31.2 v46.2,31.2
  Bottom 0.2: v46.2,31.2 46.6,30.8 54,30.8 56.6,33.4 61.06,33.4 62.73,31.73 JP4.2
P0.11
  Top 0.2: U$76.P$1 44.6,22 41.74,22 XMC4500.95
P0.12
  Top 0.2: XMC4500.94 41.43,21.6 45.1,21.6 45.7,22.2 47,22.2 U$7.P$1
P1.0  (via drill 0.2)
  Top 0.2: v36.5,13.9 36.5,15.92 XMC4500.79 | v67.9,14.1 70.8,14.1 86.03,29.32 TTL1.2
  Bottom 0.2: v67.9,14.1 67.5,13.7 62.2,13.7 60.6,12.1 52.7,12.1 51.9,12.9 37.5,12.9 v36.5,13.9
P1.1  (via drill 0.2)
  Top 0.2: v35.9,14.8 35.9,15.81 XMC4500.78 | v68.7,13.5 70.8,13.5 85.98,28.67 TTL1.3
  Bottom 0.2: v35.9,14.8 35.9,13.6 37,12.5 51.7,12.5 52.5,11.7 60.8,11.7 62.4,13.3 68.5,13.3 v68.7,13.5
P1.2  (via drill 0.2)
  Top 0.2: v35.3,13.9 35.3,15.71 XMC4500.77 | v69.5,12.9 87.5,12.9 TTL2.2
  Bottom 0.2: v69.5,12.9 62.6,12.9 61,11.3 52.3,11.3 51.5,12.1 36.6,12.1 35.3,13.4 v35.3,13.9
P1.3  (via drill 0.2)
  Top 0.2: v34.7,14.8 34.7,15.6 XMC4500.76 | v70.3,12.3 87.6,12.3 TTL2.3
  Bottom 0.2: v34.7,14.8 34.7,13.4 36.4,11.7 51.3,11.7 52.1,10.9 61.3,10.9 62.9,12.5 69,12.5 69.2,12.3 v70.3,12.3
P1.4
  Top 0.2: XMC4500.75 31.2,15.71 31.2,14.3 U$40.P$1
  Bottom 0.2: SJ2.1 28.7,9.6 U$40.P$1
P1.5  (via drill 0.2)
  Top 0.2: v32.3,17.5 32.2,17.42 XMC4500.74 30.4,15.62 v30.4,15.1
  Bottom 0.2: JP2.1 49.5,4.79 49.5,9.2 47.8,10.9 36,10.9 33.7,13.2 33.7,16.4 32.6,17.5 v32.3,17.5 | SJ1.1 29.36,12.3 30.3,12.3 30.6,12.6 30.6,14.9 v30.4,15.1
P1.8
  Top 0.2: U$57.P$1 37.5,15.5 36.5,16.5 36.5,17.34 XMC4500.81
P1.10
  Top 0.2: XMC4500.73 29.7,15.63 U$59.P$1
P1.11
  Top 0.2: XMC4500.72 29.3,15.94 29.3,14.7 U$60.P$1
P1.13
  Top 0.2: U$62.P$1 29.2,16.5 29.2,17.25 XMC4500.70
P1.14
  Top 0.2: XMC4500.69 28.2,16.96 U$63.P$1
P1.15  (via drill 0.2)
  Top 0.2: v13.1,29.5 3.6,29.5 0.9,32.2 0.9,36.14 JP3.3 4.16,38.74 5.6,37.3 7.1,37.3 7.4,37 7.4,36.5 7.3,36.4 7.3,34.9 7.7,34.5 8.25,34.5 DPS310.P5 | v30.4,20 30.4,19.86 XMC4500.68 | v15.7,27.2 15.9,27.4 16.5,27.4 17.6,26.3 v17.6,26
  Bottom 0.2: v30.4,20 30,19.6 27.8,19.6 23.8,23.6 23.1,23.6 20.9,25.8 17.8,25.8 v17.6,26 | v13.1,29.5 15.4,27.2 v15.7,27.2
P2.0  (via drill 0.2)
  Top 0.2: LD1.P_1 5.05,50.35 5.8,51.1 10.2,51.1 11.2,50.1 11.2,35.4 17.2,29.4 17.4,29.4 v17.6,29.6 | U$35.P$1 22.1,27.3 24.1,25.3 24.1,24.9 23.54,24.34 XMC4500.52
  Bottom 0.2: U$35.P$1 18.4,29.4 17.8,29.4 v17.6,29.6
P2.2
  Top 0.2: XMC4500.50 22.1,28.2 19.4,28.2 U$65.P$1
P2.4
  Top 0.2: R16.2 10.6,37.35 10.6,35.1 10.03,34.52 DPS310.P4 9.75,34.5 10,34.5 11.1,33.4 11.1,32.5 | 11.1,32.5 9.2,30.6 5.8,30.6 4.1,32.3 2,32.3 1.4,32.9 1.4,35.8 1.8,36.2 JP3.2 | XMC4500.48 23.11,28.6 15,28.6 11.1,32.5
P2.5  (via drill 0.2)
  Top 0.2: DPS310.P3 9.65,35.1 9.4,35.1 9.2,34.9 9.2,33.9 9.75,33.35 R17.2 9.8,32.85 9.8,32.4 8.4,31 6.16,31 JP3.1 | v12.3,30.1 4.3,30.1 v3.4,31 | XMC4500.47 23.42,29 16.1,29 U$31.P$1
  Bottom 0.2: v3.4,31 3.4,33.56 JP3.1 | U$31.P$1 15,30.1 v12.3,30.1
P2.7  (via drill 0.2)
  Top 0.2: XMC4500.53 23.03,23.1 20.6,23.1 19.9,23.8 U$29.P$1 19.8,24.6 18.2,24.6 16.3,22.7 v16.3,18.9 | LD2.P_1 10.65,3.25 v14.1,6.7
  Bottom 0.2: v14.1,6.7 14.1,7 14.6,7.5 14.6,9.4 17.5,12.3 17.5,12.7 17.7,12.9 17.7,13.6 17.5,13.8 17.5,17 16.3,18.2 v16.3,18.9
P2.10
  Top 0.2: XMC4500.44 24.44,30.1 U$28.P$1
P2.14  (via drill 0.2)
  Top 0.2: XMC4500.41 27.96,28.7 v28.3,28.7 | v53.8,37 54.4,37.6 67,37.6 69.1,39.7 78.1,39.7 78.49,39.31 JP13.4
  Bottom 0.2: U$27.P$1 20,35.4 26.9,28.7 v28.3,28.7 29.6,28.7 34.2,33.3 48,33.3 51.7,37 v53.8,37
P2.15  (via drill 0.2)
  Top 0.2: v28.5,30 28.4,29.9 27.5,29.9 26.75,30.65 XMC4500.40
  Bottom 0.2: v28.5,30 28.5,30.6 22.7,36.4 U$26.P$1
P3.0  (via drill 0.2)
  Top 0.2: XMC4500.7 41.54,30.3 U$25.P$1 | v58.7,29.9 59,29.6 59,27.6 60.9,25.7 63.18,25.7 R22.2
  Bottom 0.2: U$25.P$1 42.9,29.6 58.4,29.6 v58.7,29.9
P3.1  (via drill 0.2)
  Top 0.2: XMC4500.6 41.45,29.5 42.7,29.5 43.5,30.3 U$10.P$1 | R23.2 61.5,23.6 60.5,24.6 60.5,25.5 57.7,28.3 57.7,30 v57.5,30.2
  Bottom 0.2: U$10.P$1 45,30 57.3,30 v57.5,30.2
P3.2  (via drill 0.2)
  Top 0.2: v40,27.6 40.26,27.6 XMC4500.5 | 60.1,30 v59.9,30.2 61.8,28.3 R21.2
  Bottom 0.2: v40,27.6 40.2,27.6 41.8,29.2 58.9,29.2 v59.9,30.2
P3.3
  Top 0.2: XMC4500.93 41.12,21.2 45.9,21.2 U$6.P$1
P5.0  (via drill 0.2)
  Top 0.2: JP1.4 57.66,22.09 R15.1 55.65,23.9 54.2,23.9 53.7,24.4 MPU9250.24 | XMC4500.58 26.6,23.14 26.6,26.8 v26.5,26.9 | v35.1,30.4 38.3,27.2 v38.3,26.8
  Bottom 0.2: v35.1,30.4 31.9,30.4 28.4,26.9 v26.5,26.9 | JP1.4 56.49,22.09 55.1,20.7 49.7,20.7 47.8,22.6 47.1,22.6 46.8,22.2 45.7,22.2 45.1,21.6 40.1,21.6 38.3,23.4 v38.3,26.8
P5.1  (via drill 0.2)
  Top 0.2: XMC4500.57 24.46,21.7 v24.3,21.6
  Bottom 0.2: v24.3,21.6 25.2,21.6 27.6,19.2 31.5,19.2 34.1,16.6 34.1,13.4 36.2,11.3 48,11.3 49.9,9.4 49.9,5.2 | 49.9,5.2 50.47,4.63 | 50.47,4.63 JP2.2 | 49.9,5.2 50.47,4.63
P5.2  (via drill 0.2)
  Top 0.2: JP1.3 55.5,19.55 | 55.5,19.55 55.5,21.6 53.3,23.8 53.3,24.1 MPU9250.23 | U$37.P$1 24.25,22.2 XMC4500.56 25.6,23.55 v25.6,25 | 55.5,19.55 52.65,19.55 v52.1,19 | v50.4,19 46.5,19 v45.9,19.6 | R14.1 55.5,19.55 | v35.4,19.9 v33,19.9
  Bottom 0.2: v52.1,19 v50.4,19 | v45.9,19.6 43.1,19.6 42.1,20.6 37.5,20.6 36.8,19.9 v35.4,19.9 | v33,19.9 31.6,21.3 27.66,21.3 25.6,23.36 v25.6,25
P5.7
  Top 0.2: XMC4500.55 23.94,22.6 19.5,22.6 U$36.P$1
P14.0  (via drill 0.2)
  Top 0.2: XMC4500.31 31.44,32.3 v31.6,32.3
  Bottom 0.2: v31.6,32.3 26.2,37.7 U$41.P$1
P14.1
  Top 0.2: XMC4500.30 29.6,34.84 29.6,35.6 U$42.P$1
P14.3
  Top 0.2: XMC4500.28 27.7,38.16 U$44.P$1
P14.4
  Top 0.2: XMC4500.27 29.2,37.36 U$45.P$1
P14.5  (via drill 0.2)
  Top 0.2: R38.2 R35.1 C24.1 15.1,42.6 15.5,42.2 20.1,42.2 21.2,41.1 v21.2,40.6 | v28.5,40.2 29.7,40.2 30.1,39.8 30.1,37.17 XMC4500.26
  Bottom 0.2: v21.2,40.6 21.6,40.2 v28.5,40.2
P14.6
  Top 0.2: U$47.P$1 31.1,37.3 33.2,35.2 33.71,35.2 XMC4500.25
P14.7
  Top 0.2: R36.2 25.25,44.8 R19.1 26.82,44.85 C22.1 27.57,45.02 28.1,44.5 29.4,44.5 30.4,43.5 30.4,40.9 32.8,38.5 U$48.P$1 35.2,36.2 35.2,35.98 XMC4500.24
P14.8  (via drill 0.2)
  Top 0.2: 17.12,42.95 C23.1 | C23.1 17,44.75 R34.1 | U$49.P$1 21.9,41.3 20.25,42.95 19,42.95 R37.2 17.02,43.05 C23.1 | XMC4500.37 29.39,30.1 v29.7,30.1
  Bottom 0.2: v29.7,30.1 21.9,37.9 U$49.P$1
P14.12
  Top 0.2: U$52.P$1 35.6,37.7 35.6,35.67 XMC4500.23
P14.13
  Top 0.2: XMC4500.22 36,35.36 36,37.1 U$53.P$1
P14.15
  Top 0.2: U$55.P$1 37.1,35.05 XMC4500.20
P15.3
  Top 0.2: XMC4500.18 38.7,35.24 U$38.P$1
PWM_MC1
  Top 0.2: TTL1.7 92.73,29.32 94.1,30.7 94.1,37 95.8,38.7 97.54,38.7 1.1
PWM_MC2
  Top 0.2: TTL1.6 95.33,28.67 95.8,28.2 97.44,28.2 2.1
PWM_MC3
  Top 0.2: TTL2.7 92.43,12.93 93.4,13.9 93.4,15.9 95.4,17.9 97.36,17.9 3.1
PWM_MC4
  Top 0.2: TTL2.6 92.93,12.28 94.3,10.9 94.3,9.1 95.7,7.7 97.36,7.7 4.1
RESET#  (via drill 0.2)
  Top 0.2: SW3.P 36.85,4.7 R1.1 36.95,4.6 v38.9,4.6 45.65,4.6 | XMC4500.65 28.12,19.72 27.3,18.9 v26.8,18.9 | 45.65,4.6 C20.1 | v18.1,25.2 17.17,25.2 D8.2 | 45.65,4.6 45.65,3.6 SW3.P1
  Bottom 0.2: v18.1,25.2 18.3,25.4 20.7,25.4 22.7,23.4 22.7,22.3 24.6,20.4 25.2,20.4 26.7,18.9 v26.8,18.9 26.9,18.9 27,18.8 30,18.8 33.3,15.5 33.3,13 38.2,8.1 38.2,5.3 v38.9,4.6
SWV  (via drill 0.2)
  Top 0.2: v21.4,23.8 22.3,23.8 23.17,24.67 XMC4500.51 23.19,25.51 22.2,26.5 21.6,26.5 21.3,26.2 18.9,26.2 16.9,28.2 12.7,28.2 10.8,26.3 X2.6
  Bottom 0.2: v21.4,23.8 22.3,22.9 22.3,22.1 24.4,20 24.7,20 26.6,18.1 26.6,14.3 23.66,11.36 SJ3.2
SWV_DBG  (via drill 0.2)
  Top 0.2: XMC4200.2 20.35,11.15 v20.5,11 | XMC4200.24 8.85,17.15 8.75,17.15 8.5,17.4 8.5,18.9 v8.9,19.3
  Bottom 0.2: v8.9,19.3 9.5,19.9 22.7,19.9 23.5,19.1 23.5,17 24.4,16.1 24.4,13.8 22.14,11.54 SJ3.1 | SJ3.1 21.8,11.2 21.8,11 v20.5,11 | 22.1,11.04 SJ3.1
TCK  (via drill 0.2)
  Top 0.2: XMC4500.67 27.73,17.9 27,17.9 26,16.9 v26,16.6 | XMC4200.39 9.85,9.45 v8.7,8.3 | XMC4200.22 9.85,17.65 v10.1,17.9 10.1,20.4 9.6,20.9 v9.3,20.9
  Bottom 0.2: v26,16.6 26.1,16.7 26.1,18 24.6,19.5 24.3,19.5 23.1,20.7 9.5,20.7 v9.3,20.9 9,20.9 7.3,22.6 7.3,26.3 7.7,26.7 8.67,26.7 X2.4 | v8.7,8.3 10.1,9.7 v10.1,17.9
TMS  (via drill 0.2)
  Top 0.2: v25.5,17.5 26.3,18.3 27.4,18.3 28.47,19.37 XMC4500.66 | X2.2 8.13,25.83 6.97,27 v6.9,27 | v8.2,9.1 8.15,9.15 XMC4200.36 XMC4200.35
  Bottom 0.2: v25.5,17.5 25.5,18 24.4,19.1 24.1,19.1 22.9,20.3 9,20.3 | v8.2,9.1 8,9.3 8,10.7 7.3,11.4 7.3,13.5 6.8,14 6.8,18.1 9,20.3 | 9,20.3 6.9,22.4 v6.9,27
USB_DM  (via drill 0.2)
  Top 0.2: R10.2 77.9,44.9 v76.6,43.6 | v54.3,39 53.7,39 48,33.3 43.84,33.3 XMC4500.8
  Bottom 0.2: v76.6,43.6 75,43.6 74.3,42.9 65.1,42.9 61.6,39.4 54.7,39.4 v54.3,39 54.4,39.1
USB_DM1
  Top 0.2: XMC4200.3 15.55,11.65 15.6,11.6 20.8,11.6 23.6,8.8 26.9,8.8 27.4,8.3 R45.2
USB_DP  (via drill 0.2)
  Top 0.2: R11.2 75,44.5 v74.5,44 | v53.1,39.5 53.1,39 47.8,33.7 43.53,33.7 XMC4500.9
  Bottom 0.2: v53.1,39.5 53.4,39.8 61.4,39.8 65.1,43.5 74,43.5 v74.5,44
USB_DP1
  Top 0.2: R46.2 30,7.9 29.4,8.5 27.9,8.5 27.2,9.2 23.8,9.2 21,12 15.8,12 15.65,12.15 XMC4200.4
VAREF
  Top 0.2: XMC4500.33 27.62,34.7 C16.1 27.35,34.75 L2.1
VBAT  (via drill 0.2)
  Top 0.406: VREG1.7 62.88,46.7 | C30.2 52.8,48.6 52.03,47.83 JP5.2 | v51.5,39.5 v42.9,39.5 | v24,41.2 24,42.4 v23.6,42.8
  Top 0.61: v53.6,50.3 50.97,50.3 JP5.1 JP5.2 | VREG1.7 63.61,46.73 v64.3,47.42 | v64.3,47.42 64.4,47.52 | L4.P$2 64.6,47.72 v64.3,47.42
  Bottom 0.406: 64.2,47.42 v64.3,47.42 74.12,47.42 77.6,50.9 94.63,50.9 JP10.1 95.1,46.03 95.1,3.1 96.47,1.73 JP11.1 60.53,1.73 59.7,0.9 3.43,0.9 JP9.1 | v53.6,50.3 53.6,41.6 v51.5,39.5 | v42.9,39.5 42.6,39.8 37.7,39.8 37.6,39.7 32.8,39.7 31.2,41.3 24.1,41.3 v24,41.2 | v23.6,42.8 12.3,42.8 4.5,50.6 2.33,50.6 JP8.1
  Bottom 0.61: 64.2,47.42 61.32,50.3 v53.6,50.3
VDD3.3  (via drill 0.2)
  Top 0.2: C14.1 6.65,38.1 R16.1 8.28,37.98 DPS310.P8 | DPS310.P8 8.3,36.5 | v6.6,31.9 6.6,33.2 6.45,33.35 6.45,33.2 C15.2 | DPS310.P8 7.97,36.48 7.7,36.2 7.7,35.4 7.9,35.2 8.25,35.2 DPS310.P6 8.62,35.17 8.8,35 8.8,33.65 R17.1 | R32.1 68.09,32.38 | XMC4500.87 39,19.08 C6.1 39.72,18.92 39.5,18.7 39.5,18.3 41.5,16.3 44.3,16.3 45.6,17.6 51.4,17.6 | XMC4500.11 37.91,29.5 37.2,29.5 36.1,30.6 36.1,31.9 36.94,32.74 XMC4500.17 38.29,34.12 C3.1 38.93,33.9 39.9,33.9 41.9,35.9 v41.9,41.8 | R106.2 42.62,49.8 | 51.4,17.6 54.75,17.6 R14.2 | 51.5,22.6 50.1,22.6 | 50.1,22.6 49.6,23.1 C21.2 | 52.45,22.6 51.5,22.6 | 51.5,22.6 51.4,22.5 51.4,17.6 | v53.3,28.5 54.6,28.5 55.8,27.3 R15.2 55.15,25 MPU9250.1 | v49.8,27 MPU9250.13 | v53.3,28.5 MPU9250.8 | v53.3,28.5 | v49.4,21.9 50.1,22.6 | 23.63,31.62 C4.1 | C4.1 23.62,31.64 22.9,31.64 | 22.9,31.64 C1.1 | L3.2 24.99,34.4 23.6,34.4 22.9,33.7 22.9,31.64 | R32.1 68.39,32.38 68.7,32.7 v68.7,33.1 69.1,33.5 69.1,34.3 68.59,34.81 R28.1 | C4.1 23.63,31.17 24.1,30.7 24.55,30.7 XMC4500.43 27.1,28.15 27.1,25.5 27.9,24.7 27.9,23 26.39,21.49 XMC4500.60 24.78,19.9 C5.1 24.4,20.3 23.8,20.9 21.83,20.9 C2.1 21.6,20.67 21.6,20.5 v20.4,19.3 | MPU9250.22 52.9,22.75 C18.1 | C47.1 88.03,31.42 | 87.62,14.72 C45.1 87.6,14.9 | 87.7,13.5 TTL2.1 | 91.75,28 TTL1.5 | R41.2 5.3,11.8 v6,12.5 | XMC4200.28 7.15,14.65 C39.1 v6,14.9 | XMC4200.5 16.15,12.65 v16.2,12.6 | v16.2,15.2 16.15,15.15 XMC4200.10 | R43.2 R44.2 17.1,7.5 13.2,7.5 v13.15,7.55 12.95,7.55 12.5,8 12.5,8.6 12.2,8.9 C41.1 C34.1 | XMC4200.41 10.85,8.95 C34.1 | C37.1 9.8,7 10.2,7.4 10.2,8.6 10.5,8.9 C34.1 | v9.16,21.94 v11.8,19.3 11.6,19.1 C40.1 11.6,17.6 11.85,17.35 XMC4200.18
  Top 0.2: D7.P$2 R32.1 | 52.17,7.2 JP2.3
  Top 0.406: R7.2 R8.2 R9.2 R13.2 60.4,11.97 JP1.1 57.57,14.8 55.6,14.8 55,15.4 R14.2 | C110.1 40.59,49.88 R106.2 | R17.1 7.05,31.9 v6.6,31.9 | 52.45,22.6 52.5,22.55 C18.1 | R1.2 40.15,6.45 42.8,9.1 48.4,9.1 50.3,7.2 52.17,7.2 | R7.2 66.6,8.1 67.9,6.8 67.9,5.24 X4.4 67.9,5.16 v67.9,3.5 | R7.2 R2.2 | 88.03,31.42 TTL1.1 89.03,29.97 91,28 | 87.62,14.72 TTL2.1 88.33,13.58 90.28,11.62 | 91,28 91.75,28 | 87.6,14.9 91,18.3 91,28 | 90.28,11.62 90.28,7.08 v86.7,3.5 | JP13.1 86.11,32.59 87.2,31.5 87.95,31.5 C47.1 | TTL2.5 90.28,11.62 | X2.1 8.12,24.7 7.7,24.7 6,26.4 v6,28.7 | 13.73,36.1 15.23,37.6 24.15,37.6 | 24.15,37.6 24,37.75 24,39.3 26.7,42 28,42 v29.2,43.2 | 24.15,37.6 25.45,36.3 L2.2 25.13,35.78 L3.2
  Bottom 0.2: v53.3,28.5 51.3,28.5 v49.8,27 49.8,22.3 v49.4,21.9 | v6,14.9 v6,12.5 5.2,12.5 4.2,13.5 2.4,13.5 0.5,15.4 0.4,15.4 U$12.P$1 | v11.8,19.3 13.6,19.3 | 13.6,19.3 16.2,16.7 v16.2,15.2 v16.2,12.6 16.2,12.2 13.8,9.8 13.8,8.2 v13.15,7.55 | v9.16,21.94 9.16,23.66 X2.1 | v20.4,19.3 20.2,19.5 13.8,19.5 13.6,19.3
  Bottom 0.406: JP12.1 10.83,36.13 v6.6,31.9 6,31.3 v6,28.7 0.9,23.6 0.9,15.9 0.4,15.4 | v35.1,44.8 32.9,44.8 31.3,43.2 v29.2,43.2 | v47.4,41.8 47.5,41.7 48,41.7 51.9,37.8 66.7,37.8 68.1,36.4 68.1,33.7 v68.7,33.1 70.5,33.1 74.4,29.2 | JP1.1 58.63,15.2 60.4,15.2 74.4,29.2 | 74.4,29.2 79.9,29.2 86.1,35.4 86.1,37 | JP2.3 63.33,7.17 67,3.5 v67.9,3.5 v86.7,3.5
  other vias: 45.6,42.7 40.5,46.7 40.5,44 40.5,43.1 44.7,42.7 43.8,42.7 40.5,45.8 41.6,43 41.6,44 41.6,45.8 40.5,44.9 41.6,47.6 40.5,47.6 41.6,44.9 44.7,48.1 36,46.6 36,45.7 35.1,45.7 45.6,48.1 46.5,48.1 46.5,47.2 46.5,46.3 46.5,45.4 46.5,44.5 46.5,43.6 46.5,42.7 47.4,42.7 47.4,43.6 47.4,44.5 47.4,45.4 47.4,46.3 47.4,47.2 35.1,46.6 41.6,46.7 35.1,48.5 43.8,48.1 47.4,48.1 35.1,49.4 36,49.4 36,48.5 46.5,41.8 45.6,41.8 44.7,41.8 43.7,41.8 42.8,41.8 35.1,41.7 35.1,42.6 36,42.6 36,41.7 44.7,49 45.6,49 46.5,49 47.4,49 44.7,49.9 45.6,49.9 46.5,49.9 47.4,49.9 36,44.8
  pour Top: 33.7,52.1 33.7,41.2 48.5,41.2 48.5,52.1
  pour Bottom: 33.7,52.1 33.7,41.2 48.5,41.2 48.5,52.1
VDD5  (via drill 0.2)
  Top 0.2: 69.39,42.5 69.62,42.5 L5.P$2 | 69.94,41.94 72.24,41.94 72.3,42 | C32.1 91.78,31.27 TTL1.8 | C46.1 91.38,14.68 TTL2.8
  Top 0.406: 58.14,43.6 61,43.6 61.7,42.9 64.5,42.9 65.9,41.5 65.9,40.4 65.8,40.5 C26.1 67.22,42.42 L5.P$2 | v36.8,40.5 38.3,40.5 C109.1 38.5,42.49 VREG2.3 36.91,42.99 36.3,43.6 33.9,43.6 30.3,47.2 POWER.2 | v44.9,40.5 51.4,40.5 52,41.1 55.5,41.1 58,43.6 58.14,43.6 | 69.39,42.5 69.94,41.94 72.72,41.94 C29.1 73.53,42.5 D2.C 77.8,42.5 79.5,40.8 86.3,40.8 89.7,37.4 v89.7,32.3 90.7,31.3 91.65,31.3 C32.1 | 58.14,43.6 VREG1.4 | v89.8,14.8 91.25,14.8 C46.1 | D4.C 23.6,10.2 21.2,12.6 19.7,12.6 18.8,13.5 18.8,18.4 16.9,20.3 v16.9,21.3
  Bottom 0.406: v44.9,40.5 v36.8,40.5 36.7,40.4 33.1,40.4 31.5,42 21.5,42 16.6,37.1 16.6,21.6 v16.9,21.3 | v89.7,32.3 89.7,14.9 v89.8,14.8
VDDA
  Top 0.2: XMC4500.35 27.7,33.2 27.4,33.2 27.1,32.9 C17.1 25.47,32.9 L3.1
VDDC  (via drill 0.2)
  Top 0.2: C7.1 40.22,32.51 XMC4500.12 37.8,30.1 v37.5,30.1 | C9.1 39,17.82 39,18.4 37.68,19.72 XMC4500.86 36.77,20.6 v36.4,20.6 36.3,20.5 32.1,20.5 31.7,20.9 28.6,20.9 28.5,20.8 | C8.1 24.6,31.36 XMC4500.42 27.5,28.46 27.5,25.8 28.5,24.8 28.5,20.8 | 25.17,15.67 C11.1 24.57,15.63 C10.1 24.9,17.06 24.9,18 26.4,19.5 27.2,19.5 XMC4500.64 28.31,20.6 28.31,20.61 28.5,20.8
  Bottom 0.2: v36.4,20.6 37.5,21.7 v37.5,30.1
WTCK  (via drill 0.2)
  Top 0.2: XMC4200.34 7.35,11.65 7.1,11.4 7.1,10.8 6.9,10.6 v6.9,10.3
  Bottom 0.2: U$12.P$2 0.57,14.13 1.7,13 4,13 6,11 6.2,11 v6.9,10.3
WTMS  (via drill 0.2)
  Top 0.2: XMC4200.33 7.15,12.15 6.6,11.6 6.6,10.9 v6,10.3
  Bottom 0.2: v6,10.3 6,10.4 3.8,12.6 0.26,12.6 U$12.P$3

## Text on the board
Top: Layer 1 TOP
Bottom: Layer 2 BOT
tPlace: TOP PLACE
tNames: TOP NAMES
tValues: TOP VALUES
tSilk: TOP Silkscreen | DPS310 | Origa | MPU9x50 | XMC4500 / F100K1024 | DEBUG | State1 | State2 | www.mci.edu | 9250 | State3 | Origa | SD-Card | PMM TI COP | RESET
bSilk: BOT Silkscreen | LED | out | BATTERY | in | 3 | 2 | 1 | GND | IN | in | 5V | GND | out | LED | GND | BAT / safety | 5V IN | MC1 | GND | P14.4 | Pressure / Sensor | GND | P14.1 | P14.8 | P2.14 | P0.4 | GND | 3V3 | P1.15 | P14.3 | P14.6 | P14.7 | P14.12 | P14.13 | P15.3 | P1.0 | P2.15 | P14.0 | JP_Origa | P2.4 | P2.14 | P14.15 | 3V3 | P0.9 | RC/GPS | P2.5 | P3.1 | P0.3 | MC2 | GND | P3.0 | P0.5 | P2.5 | P2.9 | P2.10 | P1.1 | P2.0 | P2.2 | MPU 9x50 | P0.2 | P5.7 | P2.7 | P0.6 | P0.11 | P5.2 | P0.12 | P5.0 | MC3 | GND | P3.3 | P5.2 | P1.14 | GND | PMM TI COP | P1.2 | P1.13 | P1.8 | P1.10 | P1.4 | 3V3 | P1.11 | SJ3 | MC4 | GND | SJ1 | JP14 | Bluetooth | SJ2 | GND | 3V3 | P1.3 | in | P5.1 | LED | in | LED | out | P1.5 | www.mci.edu | out